# Allegro board PULSE.brd
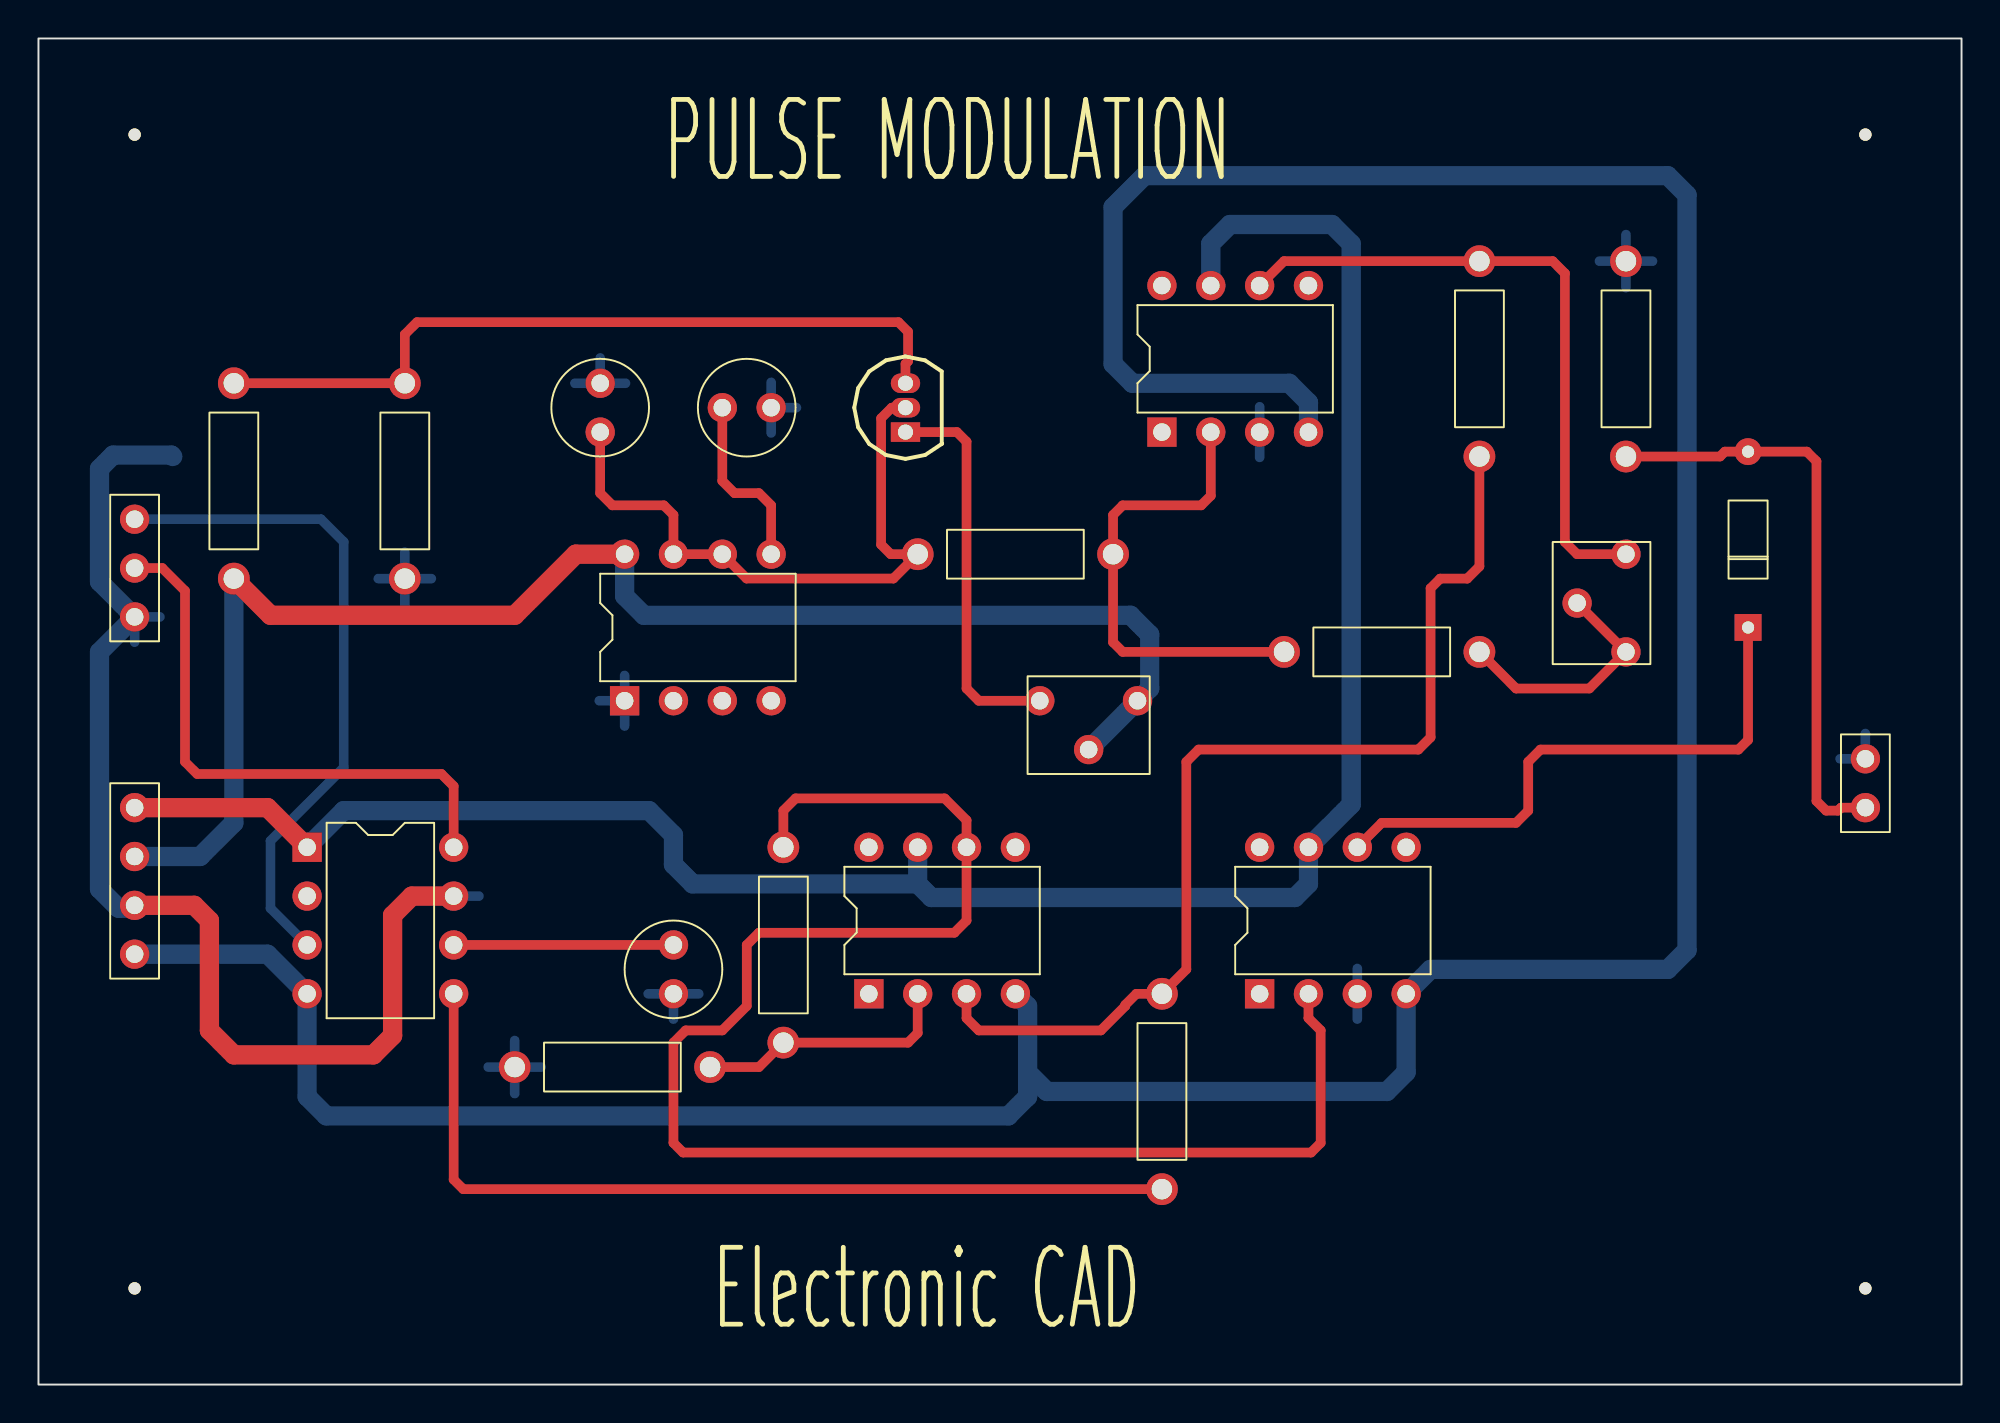
[diagram p0: board, top side]
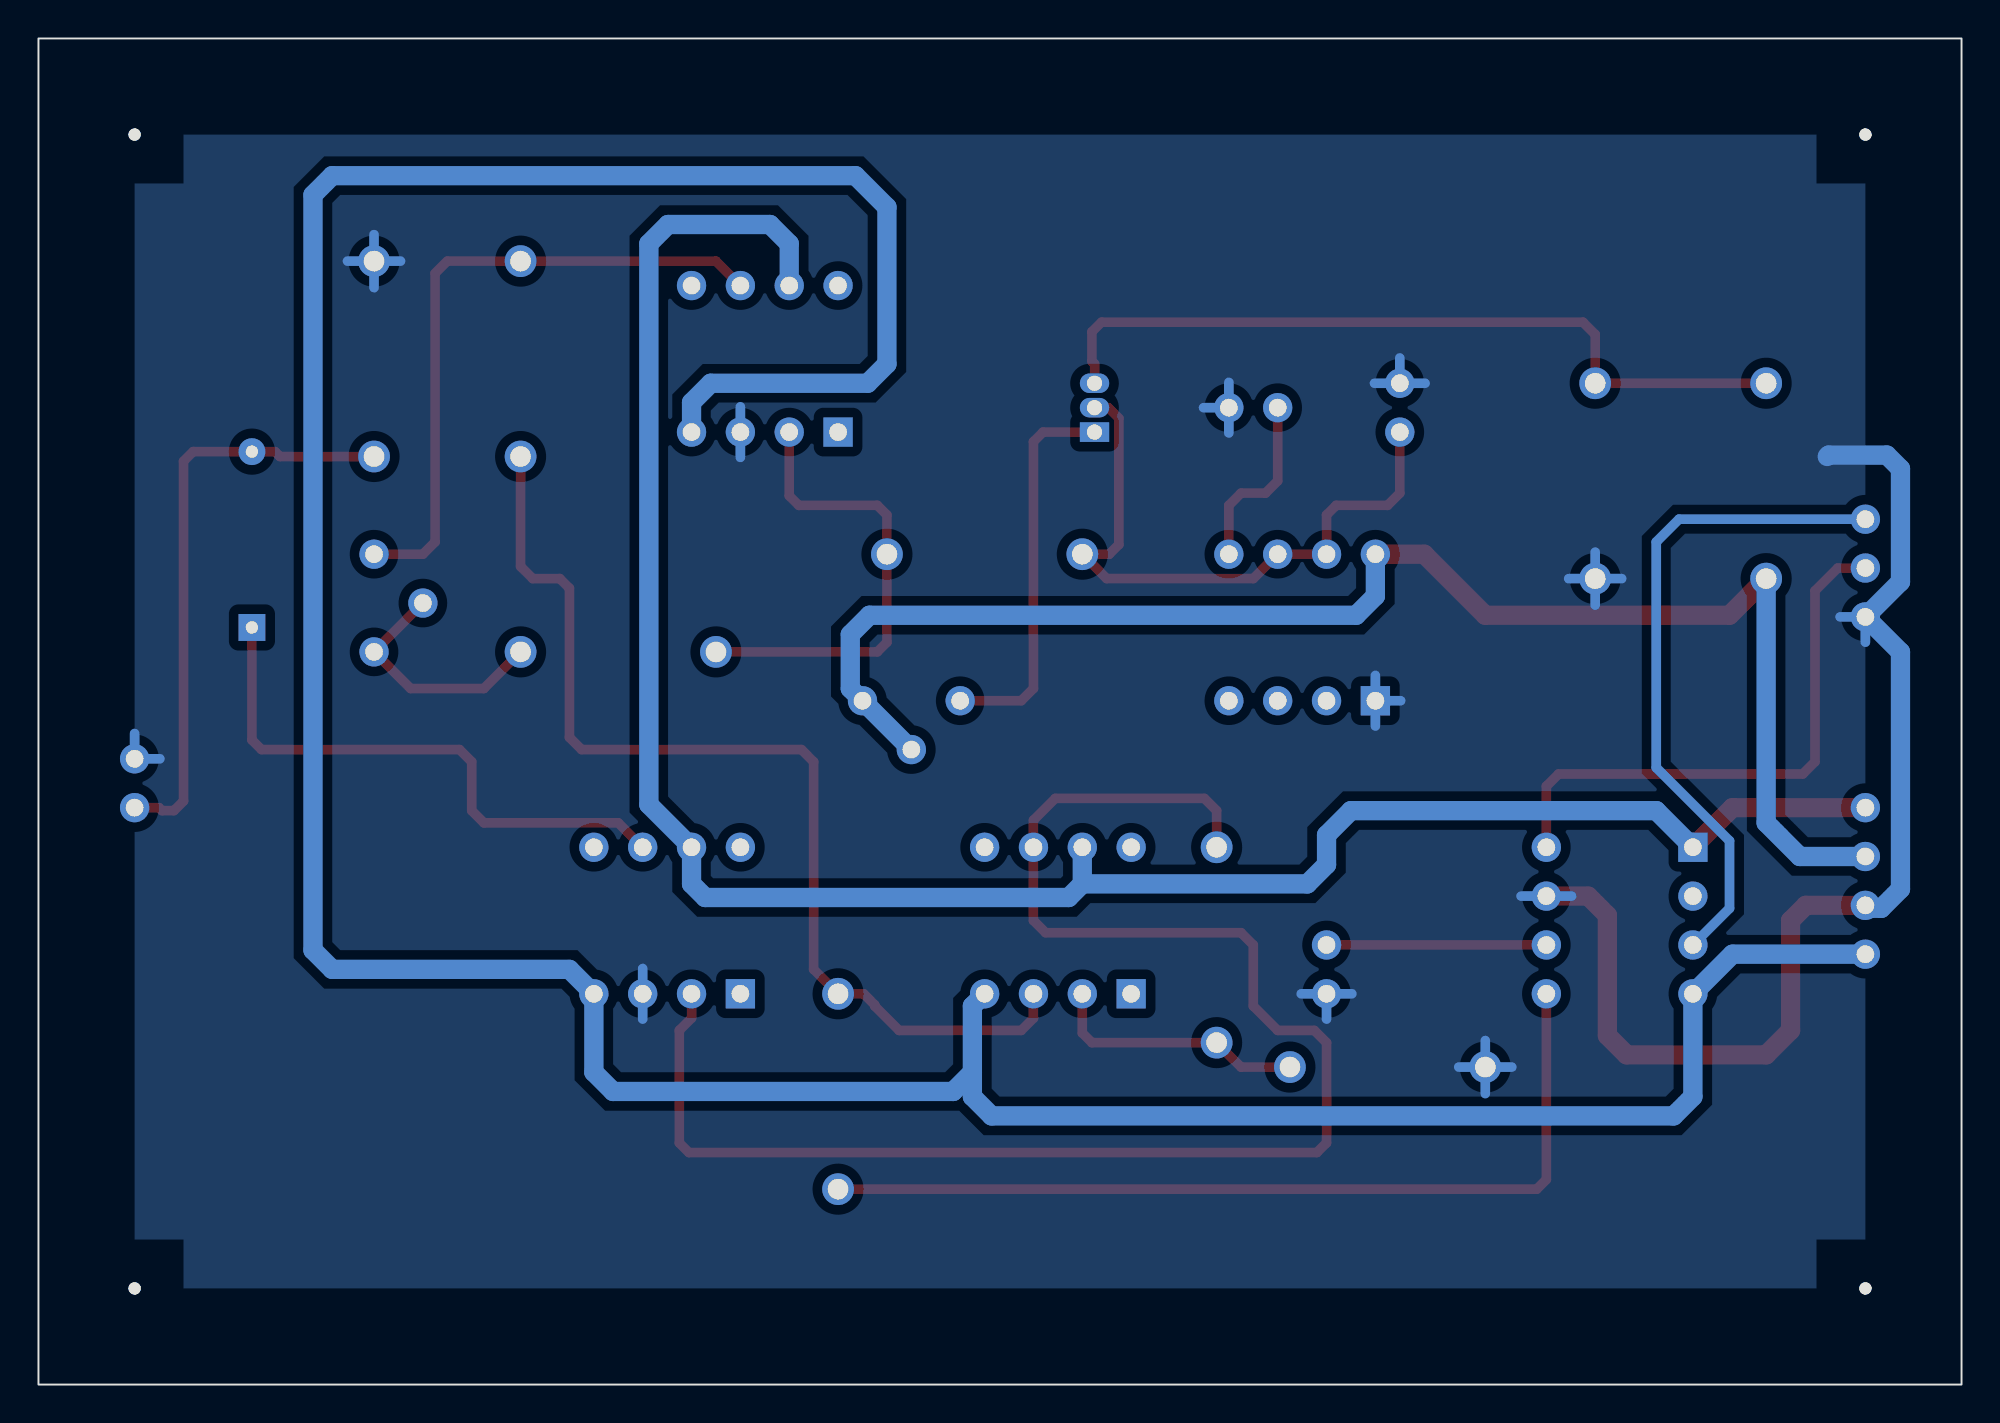
[diagram p1: board, bottom side, seen from below]

Outline 100 x 70 mm; copper layers: TOP, BOTTOM. Coordinates in mm from the lower left corner of the outline.
Outline path: rectangle 0,0 100,70

## Design rules (mm)
constraint set DEFAULT: min track width 0.5
nets with their own width: min track width 1; nets +5V +15V -15V GND

## Placement (name value [footprint] x y rotation side)
C1  0.01uF  [CAP196]  29.21 49.53 0 top
C2  0.01uF  [CAP196]  38.1 50.8 90 top
C3  0.01uF  [CAP196]  33.02 20.32 0 top
D1  D1S1588  [DO35]  88.9 39.37 0 top
J1  CON4  [JUMPER4]  5 30 270 top
J2  CON3  [JUMPER3]  5 45 270 top
J3  CON2  [JUMPER2]  95 30 90 top
NOREF  -  [unnamed]  95 65 0 top
NOREF#2  -  [unnamed]  95 5 0 top
NOREF#3  -  [unnamed]  5 65 0 top
NOREF#4  -  [#2]  0 0 90 top
NOREF#5  -  [unnamed]  5 5 0 top
NOREF#6  -  [#2]  0 70 0 top
Q1  Q2SA1015  [TO92]  45.09 49.53 90 top
R1  560  [RES400]  64.77 38.1 270 top
R2  39K  [RES400]  10.16 41.91 0 top
R3  6.2K  [RES400]  45.72 43.18 270 top
R4  100K  [RES400]  19.05 52.07 180 top
R5  10K  [RES400]  74.93 58.42 180 top
R6  10K  [RES400]  38.73 17.78 0 top
R7  10K  [RES400]  58.42 10.16 0 top
R8  10K  [RES400]  24.77 16.51 270 top
R9  10K  [RES400]  82.55 48.26 0 top
U1  NE555  [DIP8_3]  30.48 35.56 90 top
U2  LF356  [DIP8_3]  58.42 49.53 90 top
U3  LF398  [DIP8_3]  13.97 27.94 0 top
U4  LF356  [DIP8_3]  43.18 20.32 90 top
U5  LF356  [DIP8_3]  63.5 20.32 90 top
VR1  5K  [RESADJ]  52.07 35.56 90 top
VR2  20K  [RESADJ]  82.55 43.18 0 top

## Library data of the parts
C1-C3 = CAP NP: Tolerance: ***; User Part Number: ***
D1 = D1S1588
J1 = CON4: User Part Number: ***
J2 = CON3: User Part Number: ***
J3 = CON2: User Part Number: ***
Q1 = Q2SA1015
R1-R9 = R: Tolerance: ***; User Part Number: ***
U1 = NE555: Tolerance: ***; User Part Number: ***
U2 = LF356_2: Tolerance: ***; User Part Number: ***
U3 = LF398: Tolerance: ***; User Part Number: ***
U4 U5 = LF356_1: Tolerance: ***; User Part Number: ***
VR1 VR2 = POT: Tolerance: ***; User Part Number: ***

## Footprints (pads in the part's own frame, mm; a bottom-side part is the same pattern mirrored in y, then rotated)
CAP196
  round 1.524 hole 0.914: 1(0,0) 2(0,2.54)
DIP8_3
  rect 1.524x1.524 hole 0.914: 1(0,0)
  round 1.524 hole 0.914: 2(0,-2.54) 3(0,-5.08) 4(0,-7.62) 5(7.62,-7.62) 6(7.62,-5.08) 7(7.62,-2.54) 8(7.62,0)
DO35
  rect 1.397x1.397 hole 0.635: 1(0,0)
  round 1.397 hole 0.635: 2(0,9.144)
JUMPER2
  round 1.524 hole 0.914: 1(0,0) 2(2.54,0)
JUMPER3
  round 1.524 hole 0.914: 1(0,0) 2(2.54,0) 3(5.08,0)
JUMPER4
  round 1.524 hole 0.914: 1(0,0) 2(2.54,0) 3(5.08,0) 4(7.62,0)
RES400
  round 1.651 hole 1.067: 1(0,0) 2(0,10.16)
RESADJ
  round 1.524 hole 0.914: 1(0,0) 2(-2.54,-2.54) 3(0,-5.08)
TO92
  rect 1.016x1.524 hole 0.787: 1(0,0)
  oval 1.016x1.524 hole 0.787: 2(1.27,0) 3(2.54,0)
unnamed
  round 0.635 hole 3.175 unplated: (0,0)

## Nets
+5V: J1.2 R2.1 U1.8(VCC) VR1.2(WIPER) VR1.3
+15V: J1.1 U2.7(V-) U3.1 U4.7(V-) U5.7(V-)
-15V: J1.4 U2.4 U3.4(V-) U4.4 U5.4
GND: C1.2 C2.1 C3.1 J1.3 J2.3 J3.2 R4.2 R8.1 R9.2 U1.1 U2.3 U3.7 U5.3
CLOCK: U1.2
SIG_1: R5.1 U2.6 VR2.1
N00314: C1.1 Q1.2 R3.1 U1.6 U1.7
N00351: C2.2 U1.5
N00609: Q1.3 R2.2 R4.1
N00841: Q1.1(E) VR1.1
N01257: R1.1 R3.2 U2.2
N01622: R1.2 VR2.2(WIPER) VR2.3
N02976: J2.2 U3.8
N02988: J2.1 U3.3
N02996: C3.2 U3.6
N03351: R7.1 U3.5
N03452: R5.2 R7.2 U4.3
N03532: R6.1 R8.2 U4.2
N03917: R6.2 U4.6 U5.2
N04005: D1.1 U5.6
N04009: D1.2 J3.1 R9.1

Pads without a net: U1 3 4; U2 1 5 8; U3 2; U4 1 5 8; U5 1 5 8

## Routing (per net, layer and track width the routed paths; a pad name or vN(x,y) marks a point on that pad's centre or on a via; arc(x,y) is an arc through that point)
+5V: length 78.6
  TOP w1: U1.8 27.94,43.18 24.77,40.01 12.06,40.01 R2.1
  BOTTOM w1: R2.1 10.16,29.21 8.41,27.46 J1.2 ; VR1.2 VR1.3 57.78,36.2 57.78,39.01 56.78,40.01 31.48,40.01 30.48,41.01 U1.8
+15V: length 112.2
  TOP w1: J1.1 11.91,30 U3.1
  BOTTOM w1: 45.72,26.04 34.02,26.04 33.02,27.04 33.02,28.57 31.75,29.84 15.88,29.84 U3.1 ; 45.72,26.04 46.43,25.33 65.33,25.33 66.04,26.04 U5.7 68.26,30.16 68.26,59.33 67.26,60.33 61.96,60.33 60.96,59.33 U2.7 ; 45.72,26.04 U4.7
-15V: length 190.1
  BOTTOM w1: 51.44,16.24 51.44,14.97 50.44,13.97 14.97,13.97 13.97,14.97 U3.4 11.91,22.38 J1.4 ; 51.44,16.24 51.44,19.68 U4.4 ; 51.44,16.24 52.44,15.24 70.12,15.24 71.12,16.24 U5.4 72.39,21.59 84.72,21.59 85.72,22.59 85.72,61.86 84.72,62.87 57.52,62.87 55.88,61.23 55.88,53.07 56.88,52.07 65.04,52.07 66.04,51.07 U2.4
GND: length 105.5
  TOP w1: U3.7 19.41,25.4 18.41,24.4 18.41,18.14 17.41,17.14 10.16,17.14 8.89,18.41 8.89,24.13 8.1,24.92 J1.3
  BOTTOM w0.5: 63.5,48.22 U2.3 63.5,50.84 ; 20.27,25.4 U3.7 22.91,25.4 ; 38.1,49.48 C2.1 ; C2.1 39.41,50.8 ; C2.1 38.1,52.12 ; 27.89,52.07 C1.2 ; C1.2 29.21,53.38 ; C1.2 30.52,52.07 ; R4.2 19.05,43.29 ; R4.2 20.43,41.91 ; R4.2 19.05,40.53 ; R4.2 17.67,41.91 ; 33.02,19 C3.1 ; C3.1 34.34,20.32 ; C3.1 31.7,20.32 ; 68.58,19 U5.3 68.58,21.64 ; 30.48,34.24 U1.1 ; U1.1 30.48,36.88 ; U1.1 29.16,35.56 ; 23.39,16.51 R8.1 ; R8.1 24.77,15.13 ; R8.1 26.14,16.51 ; R8.1 24.77,17.89 ; 5,38.6 J2.3 6.32,39.92 ; R9.2 83.93,58.42 ; R9.2 81.17,58.42 ; R9.2 82.55,59.8 ; R9.2 82.55,57.04 ; 93.69,32.54 J3.2 95,33.85
  BOTTOM w1: 6.99,48.26 6.91,48.33 3.88,48.33 3.17,47.63 3.17,41.74 J2.3 3.17,38.09 3.17,25.77 4.17,24.77 4.84,24.77 J1.3
SIG_1: length 34.1
  TOP w0.5: U2.6 64.77,58.42 R5.1 78.74,58.42 79.38,57.78 79.38,43.81 80.01,43.18 VR2.1
N00314: length 33.4
  TOP w0.5: Q1.2 44.37,50.8 43.82,50.25 43.82,43.68 44.32,43.18 R3.1 44.45,41.91 36.83,41.91 U1.6 U1.7 33.02,45.22 32.52,45.72 29.84,45.72 29.21,46.35 C1.1
N00351: length 9.4
  TOP w0.5: U1.5 38.1,45.72 37.47,46.35 36.2,46.35 35.56,46.99 C2.2
N00609: length 40.8
  TOP w0.5: R2.2 R4.1 19.05,54.61 19.68,55.24 44.72,55.24 45.22,54.74 45.22,53.22 45.09,53.08 Q1.3
N00841: length 20.3
  TOP w0.5: VR1.1 48.9,35.56 48.26,36.2 48.26,49.03 47.76,49.53 Q1.1
N01257: length 24.5
  TOP w0.5: R1.1 56.38,38.1 55.88,38.6 R3.2 55.88,45.22 56.38,45.72 60.46,45.72 60.96,46.22 U2.2
N01622: length 12.8
  TOP w0.5: R1.2 76.83,36.2 80.64,36.2 VR2.3 VR2.2
N02976: length 29.7
  TOP w0.5: U3.8 21.59,31.11 20.95,31.75 8.26,31.75 7.62,32.38 7.62,41.27 6.43,42.46 J2.2
N02988: length 34.7
  BOTTOM w0.5: J2.1 14.69,45 15.88,43.81 15.88,32.08 12.06,28.27 12.06,24.77 U3.3
N02996: length 11.4
  TOP w0.5: U3.6 C3.2
N03351: length 46.7
  TOP w0.5: R7.1 22.09,10.16 21.59,10.66 U3.5
N03452: length 54.8
  TOP w0.5: R5.2 74.93,42.55 74.3,41.91 72.89,41.91 72.39,41.41 72.39,33.66 71.75,33.02 60.33,33.02 59.69,32.38 59.69,21.59 R7.2 57.09,20.32 56.52,19.75 56.52,19.68 55.24,18.41 48.9,18.41 48.26,19.05 U4.3
N03532: length 13.6
  TOP w0.5: U4.2 45.72,18.28 45.22,17.78 R6.1 37.47,16.51 R8.2
N03917: length 84.4
  TOP w0.5: U5.2 66.04,19.05 66.67,18.42 66.67,12.56 66.17,12.06 33.52,12.06 33.02,12.56 33.02,17.78 33.66,18.41 35.56,18.41 36.83,19.68 36.83,22.86 37.47,23.5 47.62,23.5 48.26,24.13 U4.6 48.26,29.34 47.12,30.48 39.37,30.48 38.73,29.84 R6.2
N04005: length 30
  TOP w0.5: D1.1 88.9,33.52 88.4,33.02 78.11,33.02 77.47,32.38 77.47,29.84 76.83,29.21 69.85,29.21 U5.6
N04009: length 30.7
  TOP w0.5: R9.1 87.44,48.26 87.7,48.51 D1.2 91.96,48.51 92.46,48.01 92.46,30.34 92.96,29.84 93.58,29.84 93.73,30 J3.1

## Copper pours and planes (outline as drawn; the poured copper is in the pictures)
GND on BOTTOM: 95,5 95,65 5,65 5,5 ; 1 cut-out

## Text on the board
Ref Des/Silkscreen Top: PULSE MODULATION | Electronic CAD
COMPVAL_TYPE_TOP: FIGURE | FINISHED_SIZE | 0.635 | 0.787 | 0.914 | 1.067 | 3.175 | DRILL CHART: TOP to BOTTOM | ALL UNITS ARE IN MILLIMETERS | PLATED | NON-PLATED | QTY | 2 | 3 | 61 | 18 | 4
